# EAGLE board Team 3 Smart Aquarium (EAGLE 7.6.0)

Size 73.58 x 63.39 mm. Coordinates in mm from the lower left corner, seen from the top.
Outline: 0,0 56.82,0 56.82,53.33 0,53.33 0,0
Copper layers (1*16): Top 0.035mm / dielectric 1.5mm / Bottom 0.035mm
Design rules "default": minimum track width 10mil, minimum drill 24mil, track to track 8mil, track to pad 8mil, pad to pad 8mil, via to via 8mil, smd to smd 8mil, copper to edge 40mil, drill to drill 8mil, minimum pad ring 10mil, minimum via ring 8mil, stop-mask expansion 4mil, vias tented up to drill 0mil, thermal gap 10mil

## Footprints (pad centres in the part's own frame; a part is rotated, then mirrored left to right if it is on the bottom)
M3XXH = drill 1.016 long: 1 -3.81,3.81; 2 -3.81,-3.81; O -6.35,-3.81; P 6.35,-3.81; P@ 6.35,3.81; S -6.35,3.81
2P-2.54-65/35MIL = drill 0.889 pad 1.651 square: 1 0,1.27 | drill 0.889 pad 1.651: 2 0,-1.27
0207/10 = drill 0.813 octagon: 1 -5.08,0; 2 5.08,0
B25V = drill 0.813 long: A 2.54,0.635; E -2.54,0.635; S 0,0.635
1X3P-2.54-2.54-11.6-3.0-BLACK-MALE = drill 0.889 pad 1.651 square: 1 0,2.54 | drill 0.889 pad 1.651: 2 0,0; 3 0,-2.54
TO92 = drill 0.813 octagon: 1 1.27,0; 2 0,1.905; 3 -1.27,0
1X16P-2.54-2.54-11.6-3.0-BLACK-MALE = drill 0.889 pad 1.651 square: 1 0,19.05 | drill 0.889 pad 1.651: 2 0,16.51; 3 0,13.97; 4 0,11.43; 5 0,8.89; 6 0,6.35; 7 0,3.81; 8 0,1.27; 9 0,-1.27; 10 0,-3.81; 11 0,-6.35; 12 0,-8.89; 13 0,-11.43; 14 0,-13.97; 15 0,-16.51; 16 0,-19.05
ARDUINO_UNO = drill 1.016 pad 1.88: 0 63.5,50.8; 1 60.96,50.8; 2 58.42,50.8; 3 55.88,50.8; 3.3V 35.56,2.54; 4 53.34,50.8; 5 50.8,50.8; 5V 38.1,2.54; 6 48.26,50.8; 7 45.72,50.8; 8 41.656,50.8; 9 39.116,50.8; 10 36.576,50.8; 11 34.036,50.8; 12 31.496,50.8; 13 28.956,50.8; A0 50.8,2.54; A1 53.34,2.54; A2 55.88,2.54; A3 58.42,2.54; A4 60.96,2.54; A5 63.5,2.54; AREF 23.876,50.8; GND 26.416,50.8; GND. 43.18,2.54; GND.. 40.64,2.54; I/OREF 30.48,2.54; N/C 27.94,2.54; RESET 33.02,2.54; SCL 18.796,50.8; SDA 21.336,50.8; VIN 45.72,2.54 | hole 3.2: 66.04,7.62; 66.04,35.56; 15.24,50.8; 13.97,2.54

## Placement (x,y rotation side)
K1  [M3XXH]  5,73.58 0 top  (outside the outline)
L1  [2P-2.54-65/35MIL]  5,111.68 0 top  (outside the outline)
M1  [2P-2.54-65/35MIL]  5,124.38 0 top  (outside the outline)
P1  30V  [2P-2.54-65/35MIL]  5,86.28 0 top  (outside the outline)
R2  220‎Ω  [0207/10]  5,48.18 0 top
R3  1k‎Ω  [0207/10]  5,98.98 0 top  (outside the outline)
Rpot2  250k‎Ω  [B25V]  5,35.48 0 top
SERVO1  [1X3P-2.54-2.54-11.6-3.0-BLACK-MALE]  5,137.08 0 top  (outside the outline)
U1  [TO92]  5,60.88 0 top
U5  [1X16P-2.54-2.54-11.6-3.0-BLACK-MALE]  5,22.78 0 top
UHeater  [ARDUINO_UNO]  5,10.08 0 top

## Library data of the parts
K1 L1 M1 P1 R2 R3 Rpot2 SERVO1 U1 U5 UHeater = AUTODESK_CIRCUITS_BREADBOARD

## Nets
N$1: U5.4 UHeater.12
N$2: U5.6 UHeater.11
N$3: U5.11 UHeater.6
N$4: U5.12 UHeater.5
N$5: U5.13 UHeater.4
N$6: U5.14 UHeater.3
N$7: Rpot2.S U5.3
N$8: R2.2 U5.15
N$9: U1.2 UHeater.A0
N$10: K1.1 UHeater.8
N$11: K1.2 UHeater.GND
N$12: K1.S P1.2
N$13: K1.P@ R3.1
N$14: L1.1 P1.1
N$15: L1.2 R3.2
N$16: M1.2 R2.1 Rpot2.A SERVO1.1 U1.3 U5.2 UHeater.2 UHeater.5V
N$17: SERVO1.2 UHeater.13
N$18: M1.1 Rpot2.E SERVO1.3 U1.1 U5.1 U5.5 U5.16 UHeater.GND..

## Tracks (layer width: path | path; a pad name or v marks a point on that pad's centre or on a via)
N$1  (1 unrouted)
N$2  (1 unrouted)
N$3  (1 unrouted)
N$4  (1 unrouted)
N$5  (1 unrouted)
N$6  (1 unrouted)
N$7  (1 unrouted)
N$8  (1 unrouted)
N$9  (1 unrouted)
N$10  (1 unrouted)
N$11  (1 unrouted)
N$12  (1 unrouted)
N$13  (1 unrouted)
N$14  (1 unrouted)
N$15  (1 unrouted)
N$16  (7 unrouted)
N$17  (1 unrouted)
N$18  (7 unrouted)